# EAGLE board main_board (EAGLE 8.2.2)

Size 160 x 100 mm. Coordinates in mm from the lower left corner, seen from the top.
Outline: 0,0 160,0 160,100 0,100 0,0
Copper layers (1*16): Top 0.035mm / dielectric 1.5mm / Bottom 0.035mm
Design rules "default *": minimum track width 20mil, minimum drill 0.35mm, track to track 20mil, track to pad 20mil, pad to pad 20mil, via to via 6mil, smd to smd 6mil, copper to edge 40mil, drill to drill 6mil, minimum pad ring 10mil, minimum via ring 8mil, stop-mask expansion 4mil, vias tented up to drill 0mil, thermal gap 10mil

## Footprints (pad centres in the part's own frame; a part is rotated, then mirrored left to right if it is on the bottom)
1X04 = drill 1.016 pad 1.88: 1 0,0; 2 2.54,0; 3 5.08,0; 4 7.62,0
C025-025X050 = drill 0.813 octagon: 1 -1.27,0; 2 1.27,0
TO220 = drill 1.118 long: 1 -2.54,-6.35; 2 0,-6.35; 3 2.54,-6.35
DCJ0303 = drill 1 pad 2 long: 1 0,3.1; 2 4.8,0; 3 0,-3
STM32F411_DISCOVERY = drill 0.5 pad 1.422 square: P$1 -26.67,27.94; P$51 24.13,27.94; P$101 -26.67,58.42; P$103 26.67,58.42 | drill 0.5 pad 1.422 octagon: P$2 -26.67,25.4; P$3 -26.67,22.86; P$4 -26.67,20.32; P$5 -26.67,17.78; P$6 -26.67,15.24; P$7 -26.67,12.7; P$8 -26.67,10.16; P$9 -26.67,7.62; P$10 -26.67,5.08; P$11 -26.67,2.54; P$12 -26.67,0; P$13 -26.67,-2.54; P$14 -26.67,-5.08; P$15 -26.67,-7.62; P$16 -26.67,-10.16; P$17 -26.67,-12.7; P$18 -26.67,-15.24; P$19 -26.67,-17.78; P$20 -26.67,-20.32; P$21 -26.67,-22.86; P$22 -26.67,-25.4; P$23 -26.67,-27.94; P$24 -26.67,-30.48; P$25 -26.67,-33.02; P$26 -24.13,27.94; P$27 -24.13,25.4; P$28 -24.13,22.86; P$29 -24.13,20.32; P$30 -24.13,17.78; P$31 -24.13,15.24; P$32 -24.13,12.7; P$33 -24.13,10.16; P$34 -24.13,7.62; P$35 -24.13,5.08; P$36 -24.13,2.54; P$37 -24.13,0; P$38 -24.13,-2.54; P$39 -24.13,-5.08; P$40 -24.13,-7.62; P$41 -24.13,-10.16; P$42 -24.13,-12.7; P$43 -24.13,-15.24; P$44 -24.13,-17.78; P$45 -24.13,-20.32; P$46 -24.13,-22.86; P$47 -24.13,-25.4; P$48 -24.13,-27.94; P$49 -24.13,-30.48; P$50 -24.13,-33.02; P$52 24.13,25.4; P$53 24.13,22.86; P$54 24.13,20.32; P$55 24.13,17.78; P$56 24.13,15.24; P$57 24.13,12.7; P$58 24.13,10.16; P$59 24.13,7.62; P$60 24.13,5.08; P$61 24.13,2.54; P$62 24.13,0; P$63 24.13,-2.54; P$64 24.13,-5.08; P$65 24.13,-7.62; P$66 24.13,-10.16; P$67 24.13,-12.7; P$68 24.13,-15.24; P$69 24.13,-17.78; P$70 24.13,-20.32; P$71 24.13,-22.86; P$72 24.13,-25.4; P$73 24.13,-27.94; P$74 24.13,-30.48; P$75 24.13,-33.02; P$76 26.67,27.94; P$77 26.67,25.4; P$78 26.67,22.86; P$79 26.67,20.32; P$80 26.67,17.78; P$81 26.67,15.24; P$82 26.67,12.7; P$83 26.67,10.16; P$84 26.67,7.62; P$85 26.67,5.08; P$86 26.67,2.54; P$87 26.67,0; P$88 26.67,-2.54; P$89 26.67,-5.08; P$90 26.67,-7.62; P$91 26.67,-10.16; P$92 26.67,-12.7; P$93 26.67,-15.24; P$94 26.67,-17.78; P$95 26.67,-20.32; P$96 26.67,-22.86; P$97 26.67,-25.4; P$98 26.67,-27.94; P$99 26.67,-30.48; P$100 26.67,-33.02; P$102 -26.67,55.88; P$104 26.67,55.88

## Placement (x,y rotation side)
ANALOG1  [1X04]  -93.98,-297.18 180 top  (outside the outline)
ANALOG2  [1X04]  -93.98,-309.88 180 top  (outside the outline)
ANALOG3  [1X04]  -93.98,-322.58 180 top  (outside the outline)
ANALOG4  [1X04]  -93.98,-347.98 180 top  (outside the outline)
ANALOG5  [1X04]  -93.98,-271.78 180 top  (outside the outline)
ANALOG6  [1X04]  -93.98,-284.48 180 top  (outside the outline)
ANALOG7  [1X04]  -93.98,-335.28 180 top  (outside the outline)
C1  10uF  [C025-025X050]  -82.55,-228.6 90 top  (outside the outline)
C2  100uF  [C025-025X050]  -82.55,-234.95 90 top  (outside the outline)
DIGITAL1  [1X04]  6.35,-266.7 0 top  (outside the outline)
DIGITAL2  [1X04]  6.35,-279.4 0 top  (outside the outline)
DIGITAL3  [1X04]  6.35,-292.1 0 top  (outside the outline)
DIGITAL4  [1X04]  6.35,-304.8 0 top  (outside the outline)
DIGITAL5  [1X04]  6.35,-317.5 0 top  (outside the outline)
DIGITAL6  [1X04]  6.35,-330.2 0 top  (outside the outline)
DIGITAL7  [1X04]  6.35,-342.9 0 top  (outside the outline)
DIGITAL8  [1X04]  6.35,-355.6 0 top  (outside the outline)
IC1  LM1117T-5.0  [TO220]  -69.85,-234.95 0 top  (outside the outline)
J1  [DCJ0303]  -95.25,-234.95 180 top  (outside the outline)
STM32F411DISC  STM32F411_DISCOVERY  [STM32F411_DISCOVERY]  -34.29,-323.85 0 top  (outside the outline)
UART1  [1X04]  -38.1,-260.35 0 bottom  (outside the outline)
UART2  [1X04]  -38.1,-273.05 0 bottom  (outside the outline)
UART3  [1X04]  -38.1,-285.75 0 bottom  (outside the outline)

## Library data of the parts
ANALOG1-ANALOG7 DIGITAL1-DIGITAL8 UART1-UART3 = SparkFun-Connectors; PROD_ID: CONN-09696
C1 C2 = resistor
IC1 = lm1117
J1 = con-jack; OC_FARNELL: unknown; OC_NEWARK: unknown
STM32F411DISC = STM32F411_DISCOVERY

## Nets
ADC1: ANALOG1.3 STM32F411DISC.P$31
ADC2: ANALOG1.2 STM32F411DISC.P$6
ADC3: ANALOG2.3 STM32F411DISC.P$33
ADC4: ANALOG2.2 STM32F411DISC.P$8
ADC5: ANALOG3.3 STM32F411DISC.P$34
ADC6: ANALOG3.2 STM32F411DISC.P$9
ADC7: ANALOG4.3 STM32F411DISC.P$36
ADC8: ANALOG4.2 STM32F411DISC.P$11
ADC9: ANALOG5.3 STM32F411DISC.P$29
ADC10: ANALOG5.2 STM32F411DISC.P$4
ADC11: ANALOG6.3 STM32F411DISC.P$30
ADC12: ANALOG6.2 STM32F411DISC.P$5
ADC13: ANALOG7.3 STM32F411DISC.P$35
ADC14: ANALOG7.2 STM32F411DISC.P$10
CLK_1: DIGITAL1.2 STM32F411DISC.P$59
CLK_2: DIGITAL2.2 STM32F411DISC.P$84
CLK_3: DIGITAL3.2 STM32F411DISC.P$58
CLK_4: DIGITAL4.2 STM32F411DISC.P$83
CLK_5: DIGITAL5.2 STM32F411DISC.P$56
CLK_6: DIGITAL6.2 STM32F411DISC.P$13
CLK_7: DIGITAL7.2 STM32F411DISC.P$38
CLK_8: DIGITAL8.2 STM32F411DISC.P$14
DATA_1: DIGITAL1.3 STM32F411DISC.P$93
DATA_2: DIGITAL2.3 STM32F411DISC.P$67
DATA_3: DIGITAL3.3 STM32F411DISC.P$92
DATA_4: DIGITAL4.3 STM32F411DISC.P$66
DATA_5: DIGITAL5.3 STM32F411DISC.P$90
DATA_6: DIGITAL6.3 STM32F411DISC.P$64
DATA_7: DIGITAL7.3 STM32F411DISC.P$45
DATA_8: DIGITAL8.3 STM32F411DISC.P$21
GND: ANALOG1.1 ANALOG2.1 ANALOG3.1 ANALOG4.1 ANALOG5.1 ANALOG6.1 ANALOG7.1 C1.2 C2.2 DIGITAL1.1 DIGITAL2.1 DIGITAL3.1 DIGITAL4.1 DIGITAL5.1 DIGITAL6.1 DIGITAL7.1 DIGITAL8.1 IC1.1 J1.2 J1.3 STM32F411DISC.P$1 STM32F411DISC.P$3 STM32F411DISC.P$12 STM32F411DISC.P$25 STM32F411DISC.P$26 STM32F411DISC.P$50 STM32F411DISC.P$51 STM32F411DISC.P$75 STM32F411DISC.P$76 STM32F411DISC.P$100 UART1.1 UART2.1 UART3.1
IN_VCC: C1.1 IC1.3 J1.1
N$1: STM32F411DISC.P$103 STM32F411DISC.P$104
N$14: STM32F411DISC.P$101 STM32F411DISC.P$102
RX1: STM32F411DISC.P$87 UART1.3
RX2: STM32F411DISC.P$7 UART2.3
RX3: STM32F411DISC.P$99 UART3.3
TX1: STM32F411DISC.P$62 UART1.2
TX2: STM32F411DISC.P$32 UART2.2
TX3: STM32F411DISC.P$74 UART3.2
VCC: ANALOG1.4 ANALOG2.4 ANALOG3.4 ANALOG4.4 ANALOG5.4 ANALOG6.4 ANALOG7.4 C2.1 DIGITAL1.4 DIGITAL2.4 DIGITAL3.4 DIGITAL4.4 DIGITAL5.4 DIGITAL6.4 DIGITAL7.4 DIGITAL8.4 IC1.2 STM32F411DISC.P$52 STM32F411DISC.P$77 UART1.4 UART2.4 UART3.4

## Tracks (layer width: path | path; a pad name or v marks a point on that pad's centre or on a via)
ADC1  (1 unrouted)
ADC2  (1 unrouted)
ADC3  (1 unrouted)
ADC4  (1 unrouted)
ADC5  (1 unrouted)
ADC6  (1 unrouted)
ADC7  (1 unrouted)
ADC8  (1 unrouted)
ADC9  (1 unrouted)
ADC10  (1 unrouted)
ADC11  (1 unrouted)
ADC12  (1 unrouted)
ADC13  (1 unrouted)
ADC14  (1 unrouted)
CLK_1  (1 unrouted)
CLK_2  (1 unrouted)
CLK_3  (1 unrouted)
CLK_4  (1 unrouted)
CLK_5  (1 unrouted)
CLK_6  (1 unrouted)
CLK_7  (1 unrouted)
CLK_8  (1 unrouted)
DATA_1  (1 unrouted)
DATA_2  (1 unrouted)
DATA_3  (1 unrouted)
DATA_4  (1 unrouted)
DATA_5  (1 unrouted)
DATA_6  (1 unrouted)
DATA_7  (1 unrouted)
DATA_8  (1 unrouted)
GND  (32 unrouted)
IN_VCC  (2 unrouted)
N$1  (1 unrouted)
N$14  (1 unrouted)
RX1  (1 unrouted)
RX2  (1 unrouted)
RX3  (1 unrouted)
TX1  (1 unrouted)
TX2  (1 unrouted)
TX3  (1 unrouted)
VCC  (21 unrouted)